# Altium PCB I2C_LCD_DHT20_PCB.PcbDoc
Units mm, origin at the board's own origin, x right, y up, seen from the top; angles counter-clockwise.
Board outline 101.64 x 69.77 mm, 2 copper layers (Top Layer, Bottom Layer); 19 components, 18 nets, 203 pads, 8 vias.
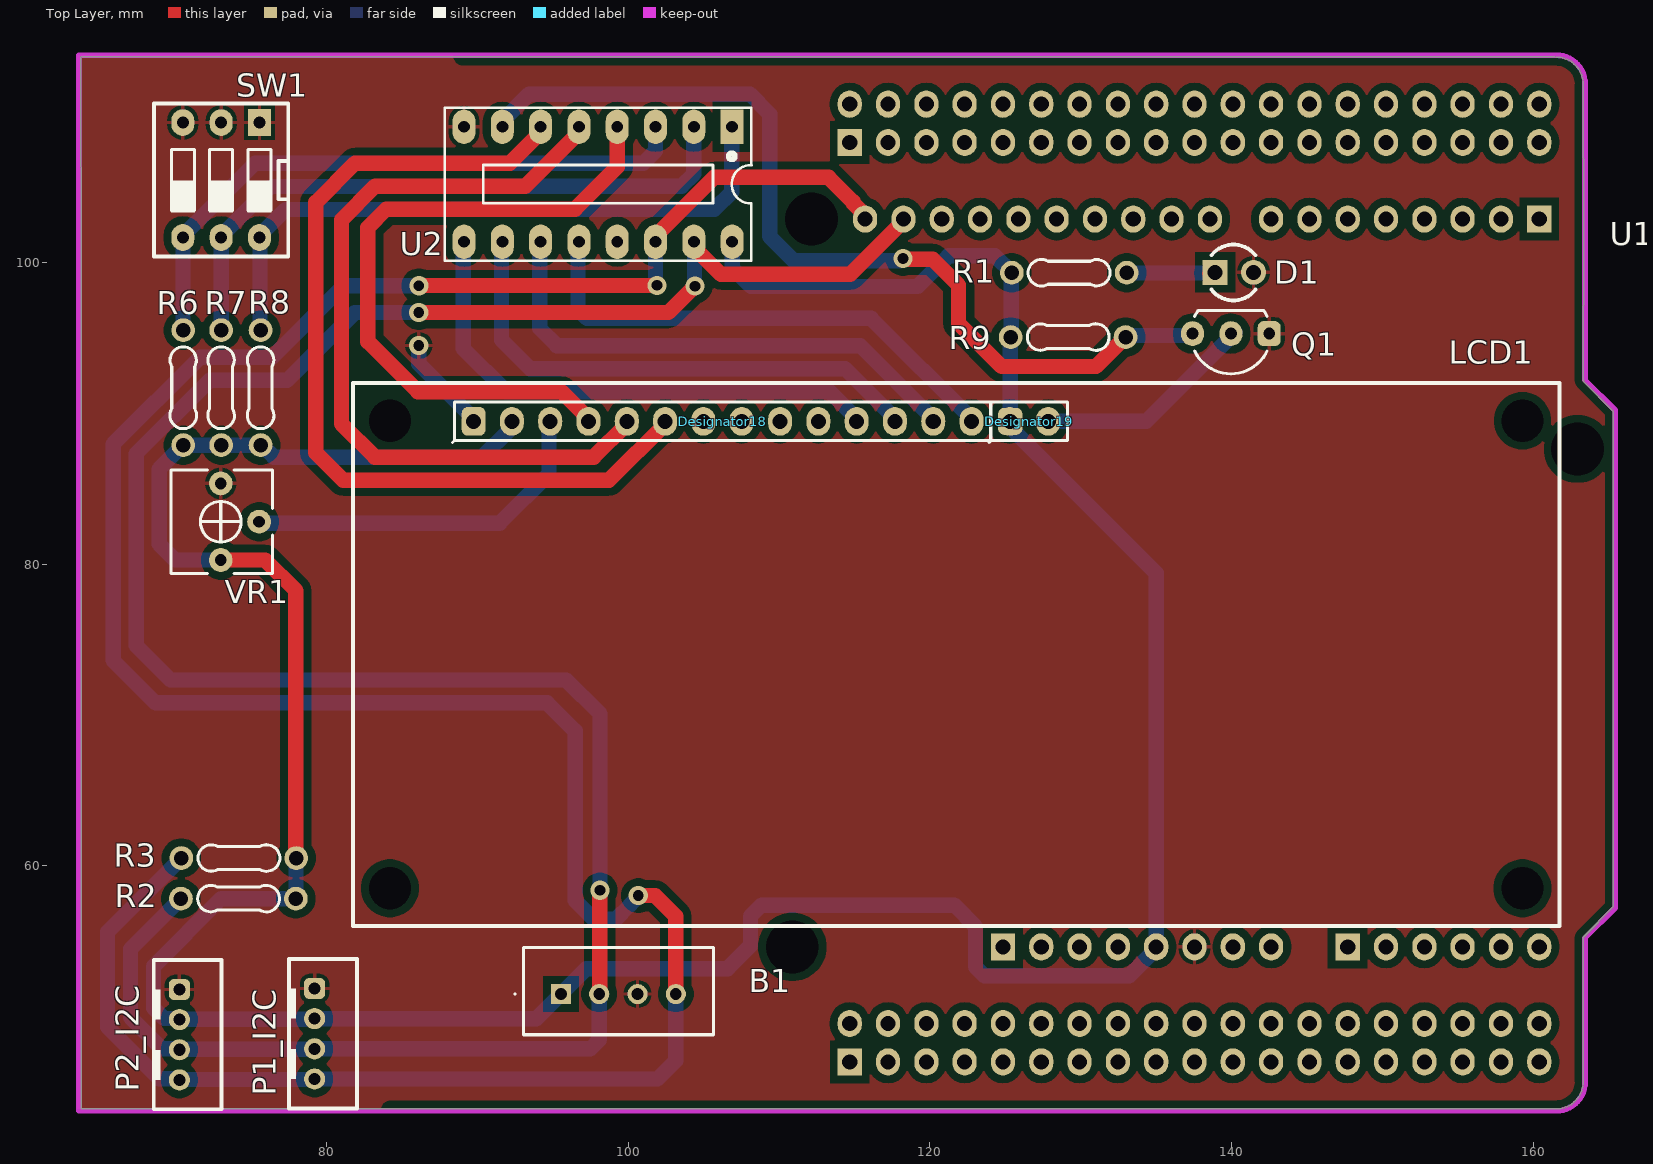
[diagram p0: Top Layer view]
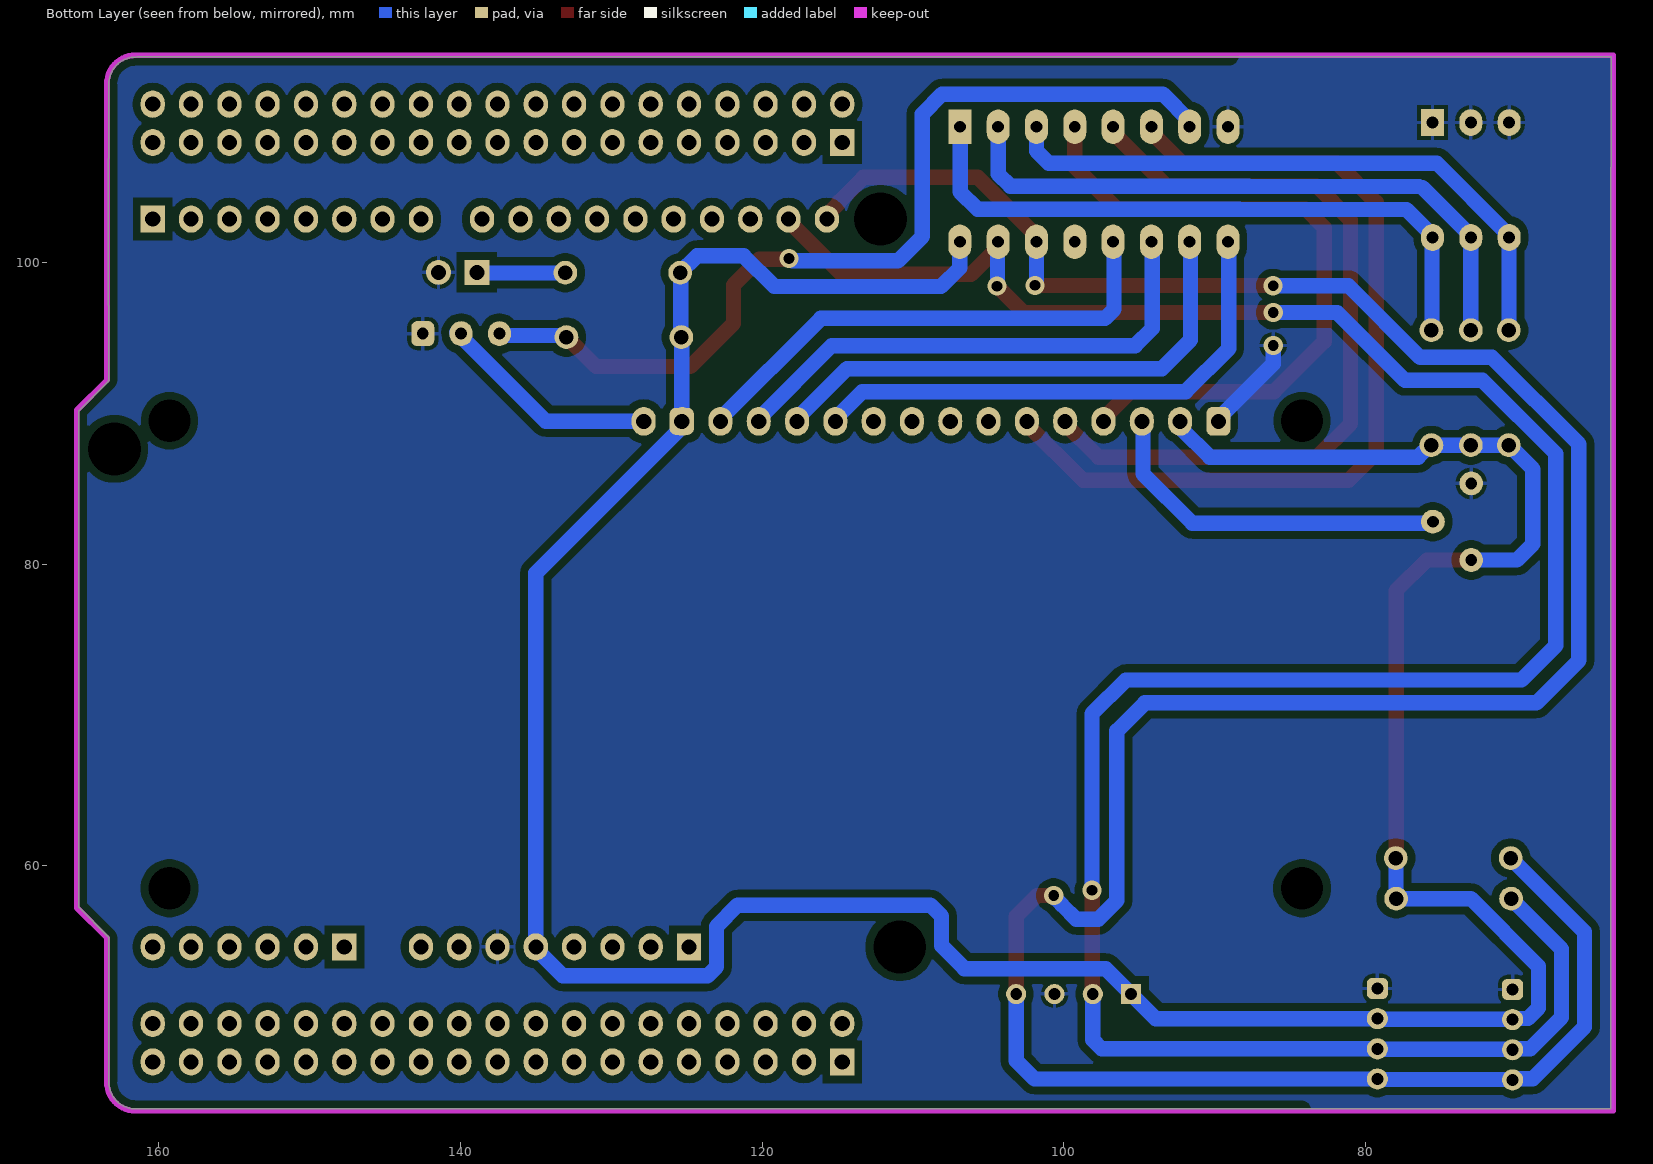
[diagram p1: Bottom Layer view, seen from below]

## Layer stack, top to bottom
Top Solder: solder mask 0.0102, Solder Resist, Dk 3.5
Top Layer: signal copper 0.0356
Dielectric 1: dielectric 0.32, FR-4, Dk 4.8
Bottom Layer: signal copper 0.0356
Bottom Solder: solder mask 0.0102, Solder Resist, Dk 3.5

## Board outline
63.729,43.867 63.729,93.086 63.729,93.088 63.729,106.263 63.678,106.367 63.678,113.639 161.458,113.639 161.536,113.613 cw(c161.536,111.835) 163.314,111.835 163.314,106.926 163.347,106.84 163.347,97.195 163.314,97.109 163.314,92.2 163.351,92.109 165.314,90.147 165.314,57.253 163.351,55.29 163.314,55.2 163.314,45.645 cw(c161.536,45.645) 161.536,43.867

## Design rules (kind name [scope] priority, off if disabled: settings)
Clearance [All] p1: gap=0.508 ignorepadtopadclearanceinfootprint=FALSE
PolygonConnect [All] p1: connectstyle=Relief reliefconductorwidth=0.254 reliefentries=4 polygonreliefangle="90 Angle" airgapwidth=0.254
RoutingVias [All] p1: holewidth=0.711 width=1.27 viastyle="Through Hole" minholewidth=0.711 minwidth=1.27 maxholewidth=0.711 maxwidth=1.27
SolderMaskExpansion [All] p1: expansion=0.102 istentingtop=FALSE
Width [All] p1: maxlimit=1.27 minlimit=0.508 preferedwidth=1.016
30 further rules are at their usual default settings.

## Classes and differential pairs
component class I2C_schematic: B1 D1 LCD1 P1_I2C P2_I2C Q1 R1 R2 R3 R6 R7 R8 R9 SW1 U1 U2 VR1

## Components (designator, comment, footprint, x,y, rotation, side; value= is the part's Value field where it differs from the comment)
B1 "SEN-18364" SEN18364 95.529,51.486 r0 top
D1 "Led" "LED 3MM - red" 140.183,99.339 r0 top
Designator18 "Comment" HDR/Header/14 106.248,89.459 r0 top
Designator19 "Comment" HDR/Header/2 126.594,89.459 r0 top
LCD1 "LCD 16x2" "LCD 1602B" 121.738,73.999 r0 top
P1_I2C "" HDR/Header/4/2mm/BOX 79.197,48.854 r270 top
P2_I2C "Header 4" HDR/Header/4/2mm/BOX 70.231,48.791 r270 top
Q1 "Transistor NPN" TO-92/W100 139.954,95.275 r180 top
R1 "1k" "R 1/4W/300" 133.045,99.314 r180 top
R2 "4.7k" "R 1/4W/300" 70.333,57.81 r0 top
R3 "4.7k" "R 1/4W/300" 70.358,60.503 r0 top
R6 "10k" "R 1/4W/300" 70.485,95.504 r270 top
R7 "10k" "R 1/4W/300" 73,95.504 r270 top
R8 "10k" "R 1/4W/300" 75.616,95.504 r270 top
R9 "4.7k" "R 1/4W/300" 125.349,95.047 r0 top
SW1 "SW DIP-3" SW/DIP3 75.54,109.271 r180 top
U1 "NUCLEO-F103RB" NUCLEO 163.441,43.74 r90 top locked
U2 "PCF8574AT" DIP16 106.883,108.991 r180 top
VR1 "10K" "R VAR A 3D" 72.974,82.804 r90 top

## Footprints (in the part's own frame and the unit in brackets; to place one, negate y for a bottom-side part, rotate by r counter-clockwise, add the part's x,y. Pads: shape width x height; smd on the part's side, far side on the other; paste and mask are expansions set on the pad)
DIP16 [mil]
  rect 60x90 hole 31: 1(0,0)
  oval 60x90 hole 31: 2(100,0) 3(200,0) 4(300,0) 5(400,0) 6(500,0) 7(600,0) 8(700,0) 9(700,300) 10(600,300) 11(500,300) 12(400,300) 13(300,300) 14(200,300) 15(100,300) 16(0,300)
  silkscreen extent -50,-50 750,350, body extent -52,-53 752,360, height 317
HDR/Header/2 [mm]
  rrect50% 1.6x1.8 hole 1: 1(-1.27,0)
  oval 1.6x1.8 hole 1: 2(1.27,0)
  silkscreen extent -2.67,-1.4 2.54,1.27, body extent -2.54,-1.27 2.54,1.27, height 8.89
HDR/Header/4/2mm/BOX [mm]
  rrect50% 1.4x1.4 hole 0.8: 1(-3,0)
  round 1.4 hole 0.8: 2(-1,0) 3(1,0) 4(3,0)
  silkscreen extent -4.95,-1.7 4.95,2.8, body extent -4.95,-1.7 4.95,2.8, height 6
HDR/Header/14 [mm]
  rrect50% 1.6x1.6 hole 1: 1(-16.51,0)
  round 1.6 hole 1: 2(-13.97,0) 3(-11.43,0) 4(-8.89,0) 5(-6.35,0) 6(-3.81,0) 7(-1.27,0) 8(1.27,0) 9(3.81,0) 10(6.35,0) 11(8.89,0) 12(11.43,0) 13(13.97,0) 14(16.51,0)
  silkscreen extent -17.91,-1.4 17.78,1.27, body extent -17.78,-1.27 17.78,1.27, height 8.89
"LCD 1602B" [mm]
  rrect50% 1.575x1.905 hole 0.991: 1(-32,15.46)
  oval 1.575x1.905 hole 0.991: 2(-29.46,15.46) 3(-26.92,15.46) 4(-24.38,15.46) 5(-21.84,15.46) 6(-19.3,15.46) 7(-16.76,15.46) 8(-14.22,15.46) 9(-11.68,15.46) 10(-9.14,15.46) 11(-6.6,15.46) 12(-4.06,15.46) 13(-1.52,15.46) 14(1.02,15.46) 15(3.56,15.46) 16(6.1,15.46)
  round 0 hole 2.8: HOLE(-37.55,15.5) HOLF(37.55,15.5) HOLG(37.55,-15.5) HOLH(-37.55,-15.5)
  silkscreen extent -40,-18 40,18, body extent -40,-18 40,18, height 13.7
"LED 3MM - red" [mil]
  rect 65x65 hole 39: 1(-50,0)
  round 65 hole 39: 2(50,0)
  silkscreen extent -60,-73 55,72, body extent -66,-65 64,65, height 207
NUCLEO [mm]
  oval 1.8x1.6 hole 1: A5_1(59.13,24.88) A5_2(59.13,27.42) A5_3(59.13,29.96) A5_4(59.13,32.5) A5_5(59.13,35.04) A5_6(59.13,37.58) A5_7(59.13,40.12) A5_8(59.13,42.66) A5_9(59.13,45.2) A5_10(59.13,47.74) A6_2(10.87,36.06) A6_3(10.87,33.52) A6_4(10.87,30.98) A6_5(10.87,28.44) A6_6(10.87,25.9) A6_7(10.87,23.36) A6_8(10.87,20.82) A8_2(10.87,13.2) A8_3(10.87,10.66) A8_4(10.87,8.12) A8_5(10.87,5.58) A8_6(10.87,3.04) A9_2(59.13,5.58) A9_3(59.13,8.12) A9_4(59.13,10.66) A9_5(59.13,13.2) A9_6(59.13,15.74) A9_7(59.13,18.28) A9_8(59.13,20.82) M7_2(5.79,48.76) M7_3(3.25,46.22) M7_4(5.79,46.22) M7_5(3.25,43.68) M7_6(5.79,43.68) M7_7(3.25,41.14) M7_8(5.79,41.14) M7_9(3.25,38.6) M7_10(5.79,38.6) M7_11(3.25,36.06) M7_12(5.79,36.06) M7_13(3.25,33.52) M7_14(5.79,33.52) M7_15(3.25,30.98) M7_16(5.79,30.98) M7_17(3.25,28.44) M7_18(5.79,28.44) M7_19(3.25,25.9) M7_20(5.79,25.9) M7_21(3.25,23.36) M7_22(5.79,23.36) M7_23(3.25,20.82) M7_24(5.79,20.82) M7_25(3.25,18.28) M7_26(5.79,18.28) M7_27(3.25,15.74) M7_28(5.79,15.74) M7_29(3.25,13.2) M7_30(5.79,13.2) M7_31(3.25,10.66) M7_32(5.79,10.66) M7_33(3.25,8.12) M7_34(5.79,8.12) M7_35(3.25,5.58) M7_36(5.79,5.58) M7_37(3.25,3.04) M7_38(5.79,3.04) M10_2(66.75,48.76) M10_3(64.21,46.22) M10_4(66.75,46.22) M10_5(64.21,43.68) M10_6(66.75,43.68) M10_7(64.21,41.14) M10_8(66.75,41.14) M10_9(64.21,38.6) M10_10(66.75,38.6) M10_11(64.21,36.06) M10_12(66.75,36.06) M10_13(64.21,33.52) M10_14(66.75,33.52) M10_15(64.21,30.98) M10_16(66.75,30.98) M10_17(64.21,28.44) M10_18(66.75,28.44) M10_19(64.21,25.9) M10_20(66.75,25.9) M10_21(64.21,23.36) M10_22(66.75,23.36) M10_23(64.21,20.82) M10_24(66.75,20.82) M10_25(64.21,18.28) M10_26(66.75,18.28) M10_27(64.21,15.74) M10_28(66.75,15.74) M10_29(64.21,13.2) M10_30(66.75,13.2) M10_31(64.21,10.66) M10_32(66.75,10.66) M10_33(64.21,8.12) M10_34(66.75,8.12) M10_35(64.21,5.58) M10_36(66.75,5.58) M10_37(64.21,3.04) M10_38(66.75,3.04)
  rect 1.8x1.6 hole 1: A6_1(10.87,38.6) A8_1(10.87,15.74) A9_1(59.13,3.04) M7_1(3.25,48.76) M10_1(64.21,48.76)
  round 0 hole 3.5 unplated: HOLD(10.87,52.57) HOLD(43.89,0.5) HOLD(59.13,51.3)
  Keep-Out Layer lines w0.381: 0,99.89 16.077,99.89 28.269,99.89 33.095,99.89 39.064,99.89 55.023,99.89 57.581,99.89 61.684,99.89 66.369,99.89 70,99.89 70,74.389 70,1.905 cw(c68.095,1.905) 68.095,0 48.46,0 46.46,-2 13.46,-2 11.46,0 1.905,0 cw(c1.905,1.905) 0,1.905 0,79.189 0,99.89
"R 1/4W/300" [mil] "Through hole resitor, axial 300mils, 1/4W"
  round 62 hole 38: 1(0,0) 2(300,0)
  silkscreen extent 44,-35 257,35, body extent -12,-47 312,47, height 97
"R VAR A 3D" [mil]
  round 62 hole 31: 1(-100,0) 2(0,-100) 3(100,0)
  silkscreen extent -135,-135 135,130, body extent -136,-136 136,136, height 205
SEN18364 [mm]
  rect 1.337x1.337 hole 0.78: 1(0,0)
  round 1.337 hole 0.78: 2(2.54,0) 3(5.08,0) 4(7.62,0)
  silkscreen extent -3.1,-2.7 10.11,3.1, body extent -10,-3.38 10,3.38, height 5.8
SW/DIP3 [mil]
  rect 60x70 hole 31: 1(0,0)
  oval 60x70 hole 31: 2(100,0) 3(200,0) 4(200,300) 5(100,300) 6(0,300)
  silkscreen extent -75,-50 275,350, body extent -50,0 250,300, height 165
TO-92/W100 [mil]
  rrect50% 60x65 hole 31: 1(-100,0)
  oval 60x65 hole 31: 2(0,0) 3(100,0)
  silkscreen extent -95,-60 95,105, body extent -114,-60 112,105, height 370

## Part data
B1: "Multiple Function Sensor Modules Humidity and Temperature Sensor - DHT20", Manufacturer_Name=SparkFun, Mouser Part Number=474-SEN-18364, Datasheet Link=https://cdn.sparkfun.com/assets/8/a/1/5/0/DHT20.pdf, Geometry.Height=16.3mm, Manufacturer_Part_Number=SEN-18364, Mouser Price/Stock=https://www.mouser.co.uk/ProductDetail/SparkFun/SEN-18364?qs=QNEnbhJQKvbVltiDzPDFyg%3D%3D
D1: "Typical LED"
LCD1: "Character LCD 16x2"
P1_I2C: library part "Header 4", "Header, 4-Pin"
P2_I2C: "Header, 4-Pin"
Q1: "NPN Bipolar Transistor"
R1 R2 R3 R6 R7 R8 R9: library part Resistor, "Resistor"
U1: "STM32F103RB, mbed-Enabled Development Nucleo-64 STM32F1 ARM® Cortex®-M3 MCU 32-Bit Embedded Evaluation Board", Manufacturer=STMicroelectronics, BRAND=STMicroelectronics, Manufacturer Product Number=NUCLEO-F103RB, PART NO=NUCLEO-F103RB, STOCK CODE=497-14362-ND, SUPPLIER=digi-key, TYPE="EVAL BRD"
U2: "Remote 8-bit I/O expander for I2C-bus with interrupt", PACKAGE=SO16, PART NO=PCF8574AT/3, BRAND=NXP, TYPE=SMD
VR1: library part "Resistor Variable", "Resistor Variable"

## Via types
v1: diameter 1.27, hole 0.711, Top Layer to Bottom Layer, 8 vias

## Nets (pads, with @x,y where several pads share a name; then routed paths per layer and width w, separated by ;. In a path a pad name is that pad's centre, name@x,y a point inside that pad or via, vN(x,y) a via of type N, cw(c..) or ccw(c..) an arc to the next point about the centre after c; other vN are vias at no path point)
+VCC: B1.1 LCD1.2 LCD1.15 P1_I2C.2 P2_I2C.2 R1.2 R2.2 R3.2 R6.2 R7.2 R8.2 R9.1 U1.A6_5 U2.16 VR1.1 | length 222
  Top Layer w1.016: VR1.1 75.921,80.264 77.953,78.232 R3.2@77.953,60.528
  Bottom Layer w1.016: P2_I2C.2@70.18,49.784 70.1,49.864 69.211,49.864 68.515,50.56 68.515,53.326 73,57.81 R2.2 ; P2_I2C.2@70.263,49.822 P1_I2C.2@79.134,49.822 ; VR1.1@73.125,80.264 VR1.1 69.952,80.264 68.885,81.331 68.885,86.284 R6.2 R7.2 75.565,87.884 R8.2@75.59,87.909 ; R8.2 75.689,87.884 76.49,87.083 90.308,87.083 92.171,88.946 92.171,89.326 LCD1.2@92.431,89.586 ; R2.2@77.978,57.633 77.965,57.645 77.965,60.49 R3.2 ; P1_I2C.2 93.897,49.854 B1.1 ; B1.1@95.606,51.562 97.214,53.17 101.307,53.17 106.586,53.17 108.105,54.689 108.105,56.645 108.836,57.376 121.618,57.376 123.025,55.969 123.025,53.289 123.62,52.694 133.213,52.694 135.001,54.482 U1.A6_5 135.001,79.4 125.578,88.824 125.578,88.863 125.298,89.142 LCD1.15 ; U2.16 106.883,99.644 108.128,98.4 119.182,98.4 121.214,100.432 124.308,100.432 R1.2 ; LCD1.15@125.298,89.408 125.324,89.433 125.324,95.021 R9.1 ; R1.2@125.324,99.314 R1.2@125.501,99.136 ; R9.1@125.387,95.047 R1.2@125.387,99.136
data4: LCD1.11 U2.9 | length 34.8
  Bottom Layer w1.016: U2.9@89.045,100.901 89.045,94.292 91.91,91.427 113.345,91.427 114.961,89.812 114.961,89.763 LCD1.11@115.214,89.51
data5: LCD1.12 U2.10 | length 34.5
  Bottom Layer w1.016: U2.10@91.585,100.901 91.585,94.851 93.485,92.951 114.361,92.951 117.501,89.812 117.501,89.509 LCD1.12@117.602,89.408
data6: LCD1.13 U2.11 | length 34.1
  Bottom Layer w1.016: U2.11@94.125,100.901 94.125,95.613 95.263,94.475 115.377,94.475 120.142,89.71 LCD1.13@120.142,89.408
data7: LCD1.14 U2.12 | length 33.4
  Bottom Layer w1.016: U2.12@96.665,100.901 96.665,96.887 97.26,96.291 116.101,96.291 122.809,89.583 LCD1.14@122.809,89.408
EN: LCD1.6 U2.6 | length 59.3
  Top Layer w1.016: U2.6 94.183,108.61 92.151,106.578 91.102,106.578 81.875,106.578 79.273,103.977 79.273,87.376 81.091,85.559 98.714,85.559 LCD1.6@102.487,89.332
GND: B1.3 D1.2 LCD1.1 P1_I2C.1 P2_I2C.1 Q1.1 SW1.1 SW1.2 SW1.3 U1.A6_6 U2.8 VR1.3 | length 6.6
  Bottom Layer w1.016: v1@86.106,94.419 86.106,93.256 89.459,89.903 89.459,89.738 LCD1.1 ; U1.A6_6 U1.A6_6@137.541,54.738
  other v1: 86.106,94.488
LED_LCD: Q1.3 R9.2 U2.7 | length 61.9
  Top Layer w1.016: v1(118.216,100.263) 118.264,100.215 120.181,100.215 121.896,98.5 121.896,95.949 124.754,93.091 131.013,93.091 R9.2
  Bottom Layer w1.016: U2.7@91.592,108.966 91.592,109.322 93.421,111.15 108.066,111.15 109.375,109.841 109.375,101.724 110.995,100.104 117.989,100.104 118.148,100.263 v1(118.216,100.263) ; R9.2 133.076,95.154 137.394,95.154 Q1.3@137.592,95.352
NetD1_1: D1.1 R1.1 | length 5.6
  Top Layer w1.016: D1.1@138.557,99.263 D1.1@138.606,99.214
  Bottom Layer w1.016: R1.1 133.058,99.301 138.57,99.301 D1.1@138.582,99.314
NetLCD1_16: LCD1.16 Q1.2 | length 14.8
  Bottom Layer w1.016: LCD1.16 134.341,89.459 Q1.2@140.233,95.352
NetR6_1: R6.1 SW1.4 U2.3 | length 41.5
  Bottom Layer w1.016: SW1.4@70.472,101.575 70.472,95.517 R6.1 ; SW1.4@70.587,101.575 70.587,101.905 75.26,106.578 100.99,106.578 101.803,107.391 U2.3
NetR7_1: R7.1 SW1.5 U2.2 | length 41.9
  Bottom Layer w1.016: R7.1 SW1.5 ; SW1.5@73.076,101.879 73.127,101.879 76.2,104.953 ; 76.441,105.029 87.71,105.029 87.735,105.054 103.532,105.054 104.343,105.865 U2.2
NetR8_1: R8.1 SW1.6 U2.1 | length 43.2
  Bottom Layer w1.016: SW1.6 75.706,101.817 75.706,101.944 77.267,103.505 88.341,103.505 88.367,103.53 105.715,103.53 106.858,104.673 U2.1@106.858,109.042 ; SW1.6@75.578,101.651 75.578,95.542 R8.1
RS: LCD1.4 U2.4 | length 45.4
  Top Layer w1.016: LCD1.4 97.358,89.634 95.565,91.427 86.042,91.427 82.728,94.742 82.728,102.311 83.947,103.53 89.84,103.53 93.414,103.53 96.469,103.53 99.263,106.324 U2.4
RW: LCD1.5 U2.5 | length 53
  Top Layer w1.016: U2.5 96.723,108.61 93.167,105.054 90.471,105.054 83.21,105.054 80.975,102.819 80.975,89.295 83.187,87.083 97.698,87.083 99.898,89.283 LCD1.5
SCL: B1.4 P1_I2C.4 P2_I2C.4 R3.1 U1.A5_10 U2.14 | length 189.6
  Top Layer w1.016: v1(86.109,98.45) 86.122,98.463 101.892,98.463 v1(101.905,98.476) ; v1(100.66,58.014) 101.778,58.014 103.149,56.642 B1.4 ; U2.14@101.702,101.473 101.702,101.651 105.687,105.636 113.287,105.636 114.907,104.016 114.907,103.922 115.701,103.128 U1.A5_10
  Bottom Layer w1.016: P2_I2C.4@70.282,45.796 70.214,45.864 68.901,45.864 65.467,49.298 65.467,55.612 R3.1 ; P2_I2C.4@70.282,45.822 79.166,45.822 P1_I2C.4 101.937,45.854 103.149,47.066 B1.4 ; v1(86.109,98.45) 81.113,98.45 76.363,93.701 71.596,93.701 65.837,87.941 65.837,73.609 68.656,70.79 94.615,70.79 96.469,68.936 96.469,57.685 97.716,56.439 99.16,56.439 100.127,57.406 100.127,57.411 100.66,57.945 v1(100.66,58.014) ; U2.14 101.803,98.646 101.905,98.545 v1(101.905,98.476)
SDA: B1.2 P1_I2C.3 P2_I2C.3 R2.1 U1.A5_9 U2.15 | length 169.7
  Top Layer w1.016: v1(86.106,96.672) 102.667,96.672 v1(104.419,98.425) ; B1.2@98.095,51.511 98.095,58.344 v1(98.12,58.369) ; U2.15@104.267,101.524 104.267,101.092 106.147,99.212 114.712,99.212 118.241,102.742 U1.A5_9
  Bottom Layer w1.016: P2_I2C.3@70.282,47.752 70.17,47.864 69.056,47.864 66.991,49.929 66.991,54.469 R2.1 ; P2_I2C.3@70.364,47.822 P1_I2C.3@79.166,47.822 ; P1_I2C.3@79.223,47.803 79.273,47.854 97.474,47.854 98.069,48.449 B1.2@98.069,51.399 ; v1(86.106,96.672) 81.864,96.672 77.368,92.177 72.227,92.177 67.361,87.31 67.361,74.6 69.647,72.314 95.881,72.314 98.12,70.075 v1(98.12,58.369) ; U2.15 104.381,101.333 104.381,98.463 v1(104.419,98.425)
VCON: LCD1.3 VR1.2 | length 24.2
  Bottom Layer w1.016: VR1.2@75.393,82.702 91.465,82.702 94.742,85.979 LCD1.3@94.742,89.51
pads on no net: Designator18.1 Designator18.2 Designator18.3 Designator18.4 Designator18.5 Designator18.6 Designator18.7 Designator18.8 Designator18.9 Designator18.10 Designator18.11 Designator18.12 Designator18.13 Designator18.14 Designator19.1 Designator19.2 LCD1.7 LCD1.8 LCD1.9 LCD1.10 LCD1.HOLE LCD1.HOLF LCD1.HOLG LCD1.HOLH U1.A5_1 U1.A5_2 U1.A5_3 U1.A5_4 U1.A5_5 U1.A5_6 U1.A5_7 U1.A5_8 U1.A6_1 U1.A6_2 U1.A6_3 U1.A6_4 U1.A6_7 U1.A6_8 U1.A8_1 U1.A8_2 U1.A8_3 U1.A8_4 U1.A8_5 U1.A8_6 U1.A9_1 U1.A9_2 U1.A9_3 U1.A9_4 U1.A9_5 U1.A9_6 U1.A9_7 U1.A9_8 U1.HOLD U1.M7_1 U1.M7_2 U1.M7_3 U1.M7_4 U1.M7_5 U1.M7_6 U1.M7_7 U1.M7_8 U1.M7_9 U1.M7_10 U1.M7_11 U1.M7_12 U1.M7_13 U1.M7_14 U1.M7_15 U1.M7_16 U1.M7_17 U1.M7_18 U1.M7_19 U1.M7_20 U1.M7_21 U1.M7_22 U1.M7_23 U1.M7_24 U1.M7_25 U1.M7_26 U1.M7_27 U1.M7_28 U1.M7_29 U1.M7_30 U1.M7_31 U1.M7_32 U1.M7_33 U1.M7_34 U1.M7_35 U1.M7_36 U1.M7_37 U1.M7_38 U1.M10_1 U1.M10_2 U1.M10_3 U1.M10_4 U1.M10_5 U1.M10_6 U1.M10_7 U1.M10_8 U1.M10_9 U1.M10_10 U1.M10_11 U1.M10_12 U1.M10_13 U1.M10_14 U1.M10_15 U1.M10_16 U1.M10_17 U1.M10_18 U1.M10_19 U1.M10_20 U1.M10_21 U1.M10_22 U1.M10_23 U1.M10_24 U1.M10_25 U1.M10_26 U1.M10_27 U1.M10_28 U1.M10_29 U1.M10_30 U1.M10_31 U1.M10_32 U1.M10_33 U1.M10_34 U1.M10_35 U1.M10_36 U1.M10_37 U1.M10_38 U2.13

## Polygon pours and split planes (outlines as drawn)
GND on Top Layer "GND_L01_P001" (solid, remove dead copper, pour order 1): 63.803,113.769 162.228,113.769 163.449,112.547 163.449,92.253 165.481,90.221 165.481,57.379 165.633,57.226 163.627,55.22 163.449,55.22 163.449,44.882 162.535,43.967 162.535,43.866 63.576,43.866 63.5,43.79 63.424,43.866 63.424,113.767
GND on Bottom Layer "GND_L02_P000" (solid, remove dead copper, pour order 0): 63.576,113.767 162.281,113.767 163.322,112.725 163.322,112.624 163.474,112.471 163.474,92.177 165.506,90.145 165.506,57.175 163.474,55.143 163.474,44.831 162.433,43.79 63.627,43.79 63.525,43.891 63.525,113.817